# EAGLE board AMS Enerdel Adapter rev9 (EAGLE 9.6.2)
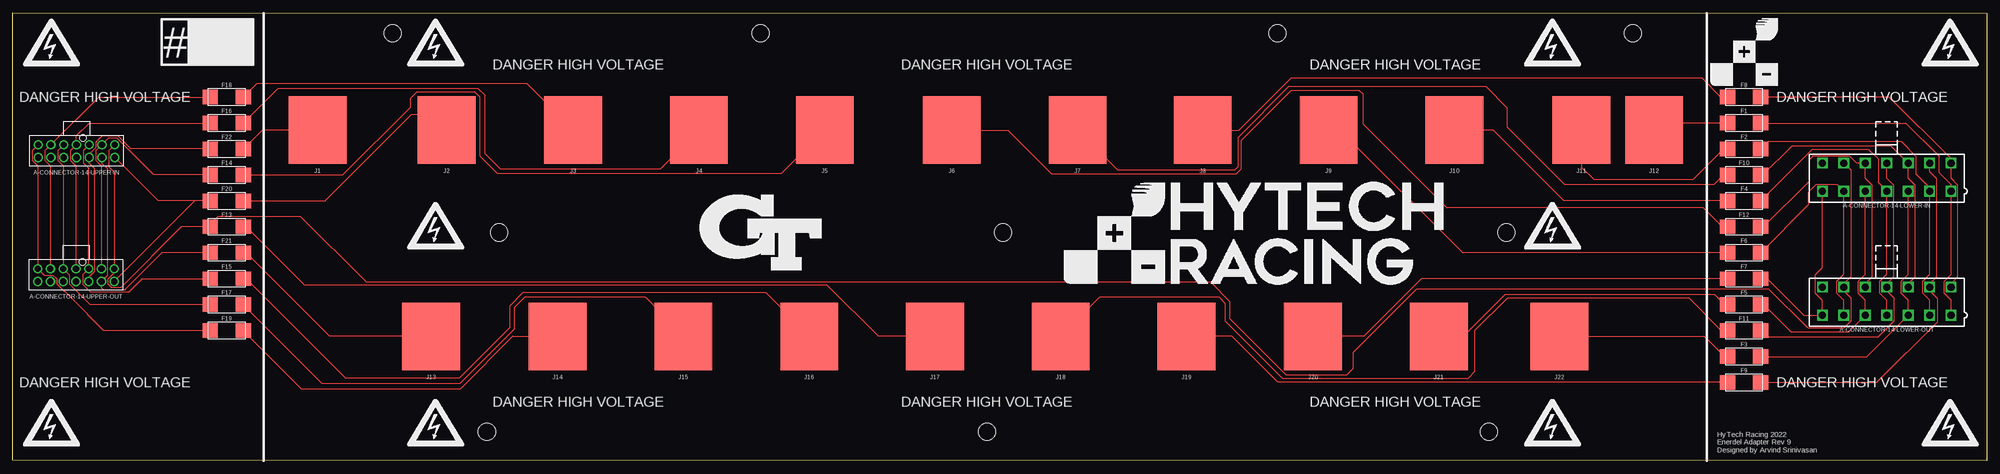
[diagram p0: board, top side]
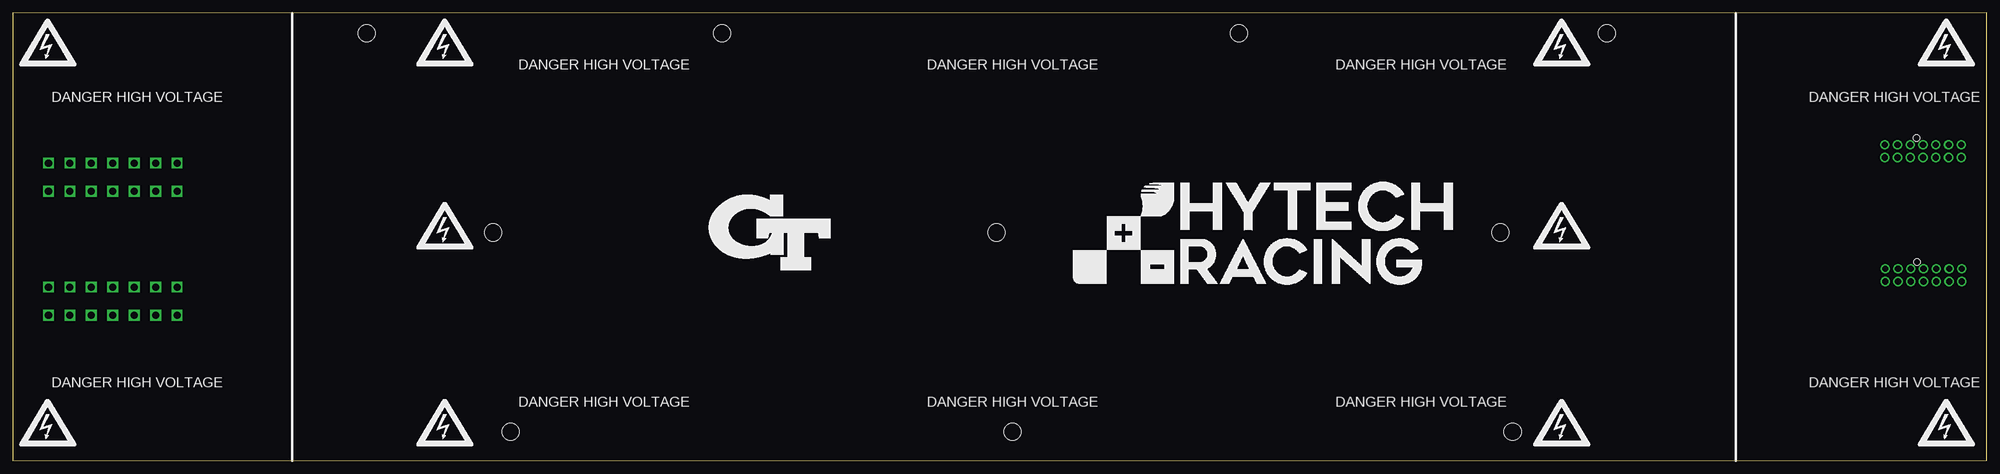
[diagram p1: board, bottom side, seen from below]

Size 386.61 x 87.73 mm. Coordinates in mm from the lower left corner, seen from the top.
Outline: 0,0.1 0,87.73 386.61,87.63 386.61,0 0,0.1
Copper layers (1*16): Top 0.035mm / dielectric 1.53mm / Bottom 0.035mm
Design rules "HyTech Default (2 Layer)": minimum track width 8mil, minimum drill 0.3mm, track to track 8mil, track to pad 8mil, pad to pad 8mil, via to via 22mil, smd to smd 8mil, copper to edge 17mil, drill to drill 23mil, minimum pad ring 9mil, minimum via ring 8mil, stop-mask expansion 8mil, vias tented up to drill 30mil, thermal gap 10mil

## Footprints (pad centres in the part's own frame; a part is rotated, then mirrored left to right if it is on the bottom)
MOLEX_MINIFIT_PTH_14 = drill 1.4 square: 1 12.6,-2.75; 2 8.4,-2.75; 3 4.2,-2.75; 4 0,-2.75; 5 -4.2,-2.75; 6 -8.4,-2.75; 7 -12.6,-2.75; 8 12.6,2.75; 9 8.4,2.75; 10 4.2,2.75; 11 0,2.75; 12 -4.2,2.75; 13 -8.4,2.75; 14 -12.6,2.75
MOLEX_NANOFIT_PTH_14 = drill 1.2: 1 7.5,0; 2 5,0; 3 2.5,0; 4 0,0; 5 -2.5,0; 6 -5,0; 7 -7.5,0; 8 7.5,-2.5; 9 5,-2.5; 10 2.5,-2.5; 11 0,-2.5; 12 -2.5,-2.5; 13 -5,-2.5; 14 -7.5,-2.5 | hole 1.3: 1.27,1.34
OMF_125 = smd 3 x 2.8: 1 -3.25,0; 2 3.25,0
5222 = smd 11.303 x 13.208: 1 0,0
MOUNTING_M3 = hole 3.4: 0,0

## Placement (x,y rotation side)
A-CONNECTOR-14-LOWER-IN  CONNECTOR-14_MINIFIT_  [MOLEX_MINIFIT_PTH_14]  367.03,55.55 0 top
A-CONNECTOR-14-LOWER-OUT  CONNECTOR-14_MINIFIT_  [MOLEX_MINIFIT_PTH_14]  367.03,31.27 0 top
A-CONNECTOR-14-UPPER-IN  CONNECTOR-14_NANOFIT_  [MOLEX_NANOFIT_PTH_14]  12.47,61.9 0 top
A-CONNECTOR-14-UPPER-OUT  CONNECTOR-14_NANOFIT_  [MOLEX_NANOFIT_PTH_14]  12.37,37.62 0 top
F1  FUSE_OMF_125_.63A  [OMF_125]  339.09,66.14 0 top
F2  FUSE_OMF_125_.63A  [OMF_125]  339.09,61.06 0 top
F3  FUSE_OMF_125_.63A  [OMF_125]  339.09,20.42 0 top
F4  FUSE_OMF_125_.63A  [OMF_125]  339.09,50.9 0 top
F5  FUSE_OMF_125_.63A  [OMF_125]  339.09,30.58 0 top
F6  FUSE_OMF_125_.63A  [OMF_125]  339.09,40.74 0 top
F7  FUSE_OMF_125_.63A  [OMF_125]  339.09,35.66 0 top
F8  FUSE_OMF_125_.63A  [OMF_125]  339.09,71.22 0 top
F9  FUSE_OMF_125_.63A  [OMF_125]  339.09,15.34 0 top
F10  FUSE_OMF_125_.63A  [OMF_125]  339.09,55.98 0 top
F11  FUSE_OMF_125_.63A  [OMF_125]  339.09,25.5 0 top
F12  FUSE_OMF_125_.63A  [OMF_125]  339.09,45.82 0 top
F13  FUSE_OMF_125_.63A  [OMF_125]  41.91,45.82 0 top
F14  FUSE_OMF_125_.63A  [OMF_125]  41.91,55.98 0 top
F15  FUSE_OMF_125_.63A  [OMF_125]  41.91,35.66 0 top
F16  FUSE_OMF_125_.63A  [OMF_125]  41.91,66.14 0 top
F17  FUSE_OMF_125_.63A  [OMF_125]  41.91,30.58 0 top
F18  FUSE_OMF_125_.63A  [OMF_125]  41.91,71.22 0 top
F19  FUSE_OMF_125_.63A  [OMF_125]  41.91,25.5 0 top
F20  FUSE_OMF_125_.63A  [OMF_125]  41.91,50.9 0 top
F21  FUSE_OMF_125_.63A  [OMF_125]  41.91,40.74 0 top
F22  FUSE_OMF_125_.63A  [OMF_125]  41.91,61.06 0 top
J1  CONNECTOR-1_5222  [5222]  59.72,64.77 180 top
J2  CONNECTOR-1_5222  [5222]  84.99,64.77 180 top
J3  CONNECTOR-1_5222  [5222]  109.75,64.77 180 top
J4  CONNECTOR-1_5222  [5222]  134.39,64.77 180 top
J5  CONNECTOR-1_5222  [5222]  159.03,64.77 180 top
J6  CONNECTOR-1_5222  [5222]  183.92,64.77 180 top
J7  CONNECTOR-1_5222  [5222]  208.56,64.77 180 top
J8  CONNECTOR-1_5222  [5222]  233.07,64.77 180 top
J9  CONNECTOR-1_5222  [5222]  257.71,64.77 180 top
J10  CONNECTOR-1_5222  [5222]  282.35,64.77 180 top
J11  CONNECTOR-1_5222  [5222]  307.24,64.77 180 top
J12  CONNECTOR-1_5222  [5222]  321.46,64.77 180 top
J13  CONNECTOR-1_5222  [5222]  81.94,24.38 180 top
J14  CONNECTOR-1_5222  [5222]  106.71,24.38 180 top
J15  CONNECTOR-1_5222  [5222]  131.34,24.38 180 top
J16  CONNECTOR-1_5222  [5222]  155.98,24.38 180 top
J17  CONNECTOR-1_5222  [5222]  180.62,24.38 180 top
J18  CONNECTOR-1_5222  [5222]  205.26,24.38 180 top
J19  CONNECTOR-1_5222  [5222]  229.9,24.38 180 top
J20  CONNECTOR-1_5222  [5222]  254.66,24.38 180 top
J21  CONNECTOR-1_5222  [5222]  279.3,24.38 180 top
J22  CONNECTOR-1_5222  [5222]  302.92,24.38 180 top
U$1  [MOUNTING_M3]  74.37,83.69 0 top
U$2  [MOUNTING_M3]  146.46,83.69 0 top
U$3  [MOUNTING_M3]  247.68,83.69 0 top
U$4  [MOUNTING_M3]  317.32,83.69 0 top
U$5  [HV_LARGE]  7.59,81.9 0 top
U$6  [HV_LARGE]  82.83,81.9 0 top
U$7  [DANGER_HIGH_VOLTAGE]  190.78,11.53 0 top
U$8  [DANGER_HIGH_VOLTAGE]  190.78,77.57 0 top
U$9  [DANGER_HIGH_VOLTAGE]  270.79,11.53 0 top
U$10  [DANGER_HIGH_VOLTAGE]  270.79,77.57 0 top
U$11  [DANGER_HIGH_VOLTAGE]  110.77,11.53 0 top
U$12  [HV_LARGE]  301.57,81.9 0 top
U$13  [HV_LARGE]  379.45,81.9 0 top
U$14  [HV_LARGE]  82.83,46.03 0 top
U$15  [DANGER_HIGH_VOLTAGE]  110.77,77.57 0 top
U$16  [LOGO_GT_LARGE]  146.46,44.7 0 top
U$17  [LOGO_HYTECH_SQUARE_EXTRA_LARGE]  339.09,80.11 0 top
U$18  [HV_LARGE]  301.57,46.03 0 top
U$19  [DANGER_HIGH_VOLTAGE]  362.23,15.34 0 top
U$20  [MOUNTING_M3]  95.28,44.7 0 top
U$21  [MOUNTING_M3]  193.95,44.7 0 top
U$22  [MOUNTING_M3]  292.51,44.7 0 top
U$23  [HV_LARGE]  7.59,7.47 0 top
U$24  [HV_LARGE]  82.83,7.47 0 top
U$25  [DANGER_HIGH_VOLTAGE]  362.23,71.22 0 top
U$26  [HV_LARGE]  301.57,7.47 0 top
U$27  [DANGER_HIGH_VOLTAGE]  18.06,15.34 0 top
U$28  [HV_LARGE]  379.45,7.47 0 top
U$29  [MOUNTING_M3]  92.86,5.72 0 top
U$30  [MOUNTING_M3]  190.78,5.72 0 top
U$31  [MOUNTING_M3]  289.08,5.72 0 top
U$32  [LOGO_HYTECH_EXTRA_LARGE]  205.74,34.39 0 top
U$33  [NUMBER]  29.21,77.57 0 top
U$34  [DANGER_HIGH_VOLTAGE]  18.06,71.22 0 top
U$35  [HV_LARGE]  301.98,81.9 0 bottom
U$36  [HV_LARGE]  83.24,81.9 0 bottom
U$37  [HV_LARGE]  301.98,7.47 0 bottom
U$38  [HV_LARGE]  83.24,7.47 0 bottom
U$39  [HV_LARGE]  83.24,46.03 0 bottom
U$40  [HV_LARGE]  301.98,46.03 0 bottom
U$41  [HV_LARGE]  379.76,81.9 0 bottom
U$42  [HV_LARGE]  379.76,7.47 0 bottom
U$43  [HV_LARGE]  7.9,81.9 0 bottom
U$44  [HV_LARGE]  7.9,7.47 0 bottom
U$45  [LOGO_HYTECH_EXTRA_LARGE]  179.07,34.39 0 bottom
U$46  [LOGO_GT_LARGE]  238.35,44.7 0 bottom

## Library data of the parts
A-CONNECTOR-14-LOWER-IN A-CONNECTOR-14-LOWER-OUT = HyTechDevices; MPN: 39-28-1143
A-CONNECTOR-14-UPPER-IN A-CONNECTOR-14-UPPER-OUT = HyTechDevices; MPN: 105310-1114
F1-F22 = HyTechDevices; CURRENT: 630mA; DKPN: 486-2997-ND; FUSE_TYPE: SMD; I2T: 0.02; MANUFACTURER: Schurter Inc.; MOPN: 693-3404.0008.11; MPN: 3404.0008.11; VOLTAGE: 125V
J1-J22 = HyTechDevices; DKPN: 36-5222-ND; MANUFACTURER: Keystone Electronics; MODEL: SPRING; MOPN: 534-5222; MPN: 5222
U$1-U$46 = HyTechManufacturing

## Nets
A1-B7: A-CONNECTOR-14-LOWER-IN.1 A-CONNECTOR-14-LOWER-OUT.1 F1.2
A2-B8: A-CONNECTOR-14-LOWER-IN.2 A-CONNECTOR-14-LOWER-OUT.2 F2.2
A3-B9: A-CONNECTOR-14-LOWER-IN.3 A-CONNECTOR-14-LOWER-OUT.3 F3.2
A4-B10: A-CONNECTOR-14-LOWER-IN.4 A-CONNECTOR-14-LOWER-OUT.4 F4.2
A5-B11: A-CONNECTOR-14-LOWER-IN.5 A-CONNECTOR-14-LOWER-OUT.5 F5.2
A6-B12: A-CONNECTOR-14-LOWER-IN.6 A-CONNECTOR-14-LOWER-OUT.6 F6.2
A7-B13: A-CONNECTOR-14-LOWER-IN.7 A-CONNECTOR-14-LOWER-OUT.7 F7.2
A8-B14: A-CONNECTOR-14-LOWER-IN.8 A-CONNECTOR-14-LOWER-OUT.8 F8.2
A9-B15: A-CONNECTOR-14-LOWER-IN.9 A-CONNECTOR-14-LOWER-OUT.9 F9.2
A10-B16: A-CONNECTOR-14-LOWER-IN.10 A-CONNECTOR-14-LOWER-OUT.10 F10.2
A11-B17: A-CONNECTOR-14-LOWER-IN.11 A-CONNECTOR-14-LOWER-OUT.11 F11.2
A12-B18: A-CONNECTOR-14-LOWER-IN.12 A-CONNECTOR-14-LOWER-OUT.12 F12.2
A13-B19: A-CONNECTOR-14-LOWER-IN.13 A-CONNECTOR-14-LOWER-OUT.13 A-CONNECTOR-14-UPPER-IN.1 A-CONNECTOR-14-UPPER-OUT.1 F13.1
A14-B20: A-CONNECTOR-14-UPPER-IN.2 A-CONNECTOR-14-UPPER-OUT.2 F14.1
A15-B21: A-CONNECTOR-14-UPPER-IN.3 A-CONNECTOR-14-UPPER-OUT.3 F15.1
A16-B22: A-CONNECTOR-14-UPPER-IN.4 A-CONNECTOR-14-UPPER-OUT.4 F16.1
A17-B23: A-CONNECTOR-14-UPPER-IN.5 A-CONNECTOR-14-UPPER-OUT.5 F17.1
A18-B24: A-CONNECTOR-14-UPPER-IN.6 A-CONNECTOR-14-UPPER-OUT.6 F18.1
A19-B25: A-CONNECTOR-14-UPPER-IN.7 A-CONNECTOR-14-UPPER-OUT.7 F19.1
A20-B26: A-CONNECTOR-14-UPPER-IN.8 A-CONNECTOR-14-UPPER-OUT.8 F20.1
A21-B27: A-CONNECTOR-14-UPPER-IN.9 A-CONNECTOR-14-UPPER-OUT.9 F21.1
A22-B28: A-CONNECTOR-14-UPPER-IN.10 A-CONNECTOR-14-UPPER-OUT.10 F22.1
N$1: F1.1 J12.1
N$2: F2.1 J11.1
N$3: F3.1 J22.1
N$4: F4.1 J10.1
N$8: F5.1 J21.1
N$9: F6.1 J9.1
N$10: F7.1 J20.1
N$11: F8.1 J8.1
N$12: F9.1 J19.1
N$13: F10.1 J7.1
N$14: F11.1 J18.1
N$15: F22.2 J1.1
N$16: F21.2 J13.1
N$17: F20.2 J2.1
N$18: F19.2 J14.1
N$19: F18.2 J3.1
N$20: F17.2 J15.1
N$21: F16.2 J4.1
N$22: F15.2 J16.1
N$23: F14.2 J5.1
N$24: F12.1 J6.1
N$25: F13.2 J17.1

## Tracks (layer width: path | path; a pad name or v marks a point on that pad's centre or on a via)
A1-B7
  Top 0.203: A-CONNECTOR-14-LOWER-OUT.1 379.63,31.49 378.27,32.84 378.27,35.19 379.63,36.55 A-CONNECTOR-14-LOWER-IN.1 379.63,54.07 377.29,56.41 377.29,59.59 370.74,66.14 F1.2
A2-B8
  Top 0.203: A-CONNECTOR-14-LOWER-OUT.2 375.43,31.49 374.08,32.84 374.08,35.19 375.43,36.55 A-CONNECTOR-14-LOWER-IN.2 375.43,53.49 372.8,56.11 372.8,59.58 369.94,62.45 343.72,62.45 F2.2
A3-B9
  Top 0.203: A-CONNECTOR-14-LOWER-IN.3 371.23,36.55 369.88,35.19 369.88,32.84 371.23,31.49 A-CONNECTOR-14-LOWER-OUT.3 363.13,20.42 F3.2
A4-B10
  Top 0.203: A-CONNECTOR-14-LOWER-OUT.4 367.03,31.49 365.67,32.84 365.67,35.19 367.03,36.55 A-CONNECTOR-14-LOWER-IN.4 365.33,54.5 365.33,59.11 363.5,60.93 352.33,60.93 342.34,50.95 F4.2
A5-B11
  Top 0.203: A-CONNECTOR-14-LOWER-IN.5 362.83,36.55 361.48,35.19 361.48,32.84 362.83,31.49 A-CONNECTOR-14-LOWER-OUT.5 359.61,25.29 348.27,25.29 342.98,30.58 F5.2
A6-B12
  Top 0.203: A-CONNECTOR-14-LOWER-OUT.6 358.63,31.49 357.27,32.84 357.27,35.19 358.63,36.55 A-CONNECTOR-14-LOWER-IN.6 357.27,54.15 353.25,54.15 351.8,52.71 351.8,50.21 F6.2
A7-B13
  Top 0.203: A-CONNECTOR-14-LOWER-IN.7 354.43,37.82 353.08,36.46 353.08,32.84 354.43,31.49 A-CONNECTOR-14-LOWER-OUT.7 350.75,28.52 343.6,35.66 F7.2
A8-B14
  Top 0.203: A-CONNECTOR-14-LOWER-OUT.8 379.63,34.7 380.99,36.06 380.99,53.98 379.63,55.33 A-CONNECTOR-14-LOWER-IN.8 379.63,59.15 367.56,71.22 F8.2
A9-B15
  Top 0.203: A-CONNECTOR-14-LOWER-IN.9 375.43,56.6 376.78,55.25 376.78,36.06 375.43,34.7 A-CONNECTOR-14-LOWER-OUT.9 375.43,33.33 376.91,31.85 376.91,27.13 365.12,15.34 F9.2
A10-B16
  Top 0.203: A-CONNECTOR-14-LOWER-OUT.10 371.23,34.7 372.59,36.06 372.59,53.98 371.23,55.33 A-CONNECTOR-14-LOWER-IN.10 367.83,61.7 348.49,61.7 342.77,55.98 F10.2
A11-B17
  Top 0.203: A-CONNECTOR-14-LOWER-IN.11 367.03,55.33 368.38,53.98 368.38,36.06 367.03,34.7 A-CONNECTOR-14-LOWER-OUT.11 367.03,33.33 368.38,31.98 368.38,27.34 365.27,24.23 343.61,24.23 F11.2
A12-B18
  Top 0.203: A-CONNECTOR-14-LOWER-OUT.12 362.83,34.7 364.18,36.06 364.18,53.98 362.83,55.33 A-CONNECTOR-14-LOWER-IN.12 361.16,58.3 359.81,59.65 352.54,59.65 351.86,58.97 351.86,54.78 342.9,45.82 F12.2
A13-B19
  Top 0.203: A-CONNECTOR-14-LOWER-IN.13 359.99,56.94 359.99,36.06 358.63,34.7 A-CONNECTOR-14-LOWER-OUT.13 358.63,33.33 359.99,31.98 359.99,27.34 358.57,25.93 351.62,25.93 343.95,33.59 274.88,33.59 262.55,21.26 262.55,18.1 261.29,16.84 249.37,16.84 238.33,27.88 238.33,31.28 234.56,35.05 69.19,35.05 56.41,47.83 40.11,47.83 38.66,46.38 F13.1 33.02,45.82 21.11,33.91 19.37,33.91 18.66,34.62 18.66,35.62 19.87,36.82 A-CONNECTOR-14-UPPER-OUT.1 19.87,56.49 18.77,57.59 18.77,60.69 A-CONNECTOR-14-UPPER-IN.1
A14-B20
  Top 0.203: A-CONNECTOR-14-UPPER-OUT.2 17.37,57.8 16.27,58.9 16.27,60.16 16.27,60.17 16.27,60.7 A-CONNECTOR-14-UPPER-IN.2 18.71,63.14 20.47,63.14 27.63,55.98 F14.1
A15-B21
  Top 0.203: A-CONNECTOR-14-UPPER-IN.3 13.77,60.69 13.77,58.35 14.87,57.25 A-CONNECTOR-14-UPPER-OUT.3 13.66,36.41 13.66,34.62 15.18,33.1 22.84,33.1 25.4,35.66 F15.1
A16-B22
  Top 0.203: A-CONNECTOR-14-UPPER-OUT.4 12.37,57.8 11.27,58.9 11.27,60.69 A-CONNECTOR-14-UPPER-IN.4 12.47,63.64 14.97,66.14 F16.1
A17-B23
  Top 0.203: A-CONNECTOR-14-UPPER-IN.5 8.77,60.69 8.77,58.9 9.87,57.8 A-CONNECTOR-14-UPPER-OUT.5 11.16,36.32 11.16,34.62 15.2,30.58 F17.1
A18-B24
  Top 0.203: A-CONNECTOR-14-UPPER-OUT.6 7.37,57.8 6.27,58.9 6.27,60.69 A-CONNECTOR-14-UPPER-IN.6 16.79,71.22 F18.1
A19-B25
  Top 0.203: A-CONNECTOR-14-UPPER-IN.7 3.77,60.69 3.77,58.9 4.87,57.8 A-CONNECTOR-14-UPPER-OUT.7 6.16,36.32 7.87,36.32 8.57,35.62 8.57,34.71 10.12,33.16 10.2,33.16 11.47,31.89 11.51,31.85 17.86,25.5 F19.1
A20-B26
  Top 0.203: F20.1 35.65,50.9 | A-CONNECTOR-14-UPPER-OUT.8 35.65,50.9 | 35.65,50.9 28.47,50.9 A-CONNECTOR-14-UPPER-IN.8
A21-B27
  Top 0.203: A-CONNECTOR-14-UPPER-IN.9 17.47,58.31 18.57,57.21 18.57,36.32 A-CONNECTOR-14-UPPER-OUT.9 17.37,33.85 17.71,33.51 21.98,33.51 22,33.53 22.23,33.76 29.21,40.74 F21.1
A22-B28
  Top 0.203: A-CONNECTOR-14-UPPER-OUT.10 14.87,35.91 16.07,37.12 16.07,57.21 14.97,58.31 A-CONNECTOR-14-UPPER-IN.10 14.97,60.01 16.27,61.31 16.27,62.44 16.3,62.44 17.42,63.55 20.64,63.55 23.13,61.06 F22.1
N$1
  Top 0.203: J12.1 322.58,64.77 323.95,66.14 F1.1
N$2
  Top 0.203: J11.1 307.24,57.53 309.73,55.04 329.06,55.04 335.08,61.06 F2.1
N$3
  Top 0.203: F3.1 335.28,20.42 331.47,24.23 331.32,24.38 J22.1
N$4
  Top 0.203: J10.1 289.97,64.77 303.84,50.9 F4.1
N$8
  Top 0.203: J21.1 284.15,24.38 292.27,32.5 333.35,32.5 335.27,30.58 F5.1
N$9
  Top 0.203: F6.1 283.97,40.74 259.94,64.77 J9.1
N$10
  Top 0.203: F7.1 275.91,35.66 264.63,24.38 J20.1
N$11
  Top 0.203: J8.1 240.16,64.77 250.3,74.92 330.87,74.92 334.57,71.22 F8.1
N$12
  Top 0.203: J19.1 238.78,24.38 247.83,15.34 F9.1
N$13
  Top 0.203: J7.1 216.43,56.9 239.29,56.9 239.95,57.56 239.95,63.27 249.99,73.3 288.48,73.3 292.62,69.16 292.62,65.43 303.92,54.13 333.26,54.13 335.12,55.98 F10.1
N$14
  Top 0.203: J18.1 212.88,32 236.3,32 237.51,30.78 237.51,27.3 248.74,16.08 284.96,16.08 286.31,17.42 286.31,25.48 292.68,31.85 328.32,31.85 334.67,25.5 F11.1
N$15
  Top 0.203: F22.2 46.71,62.61 47.7,63.6 48.87,64.77 J1.1
N$16
  Top 0.203: J13.1 62.08,24.38 49.53,36.93 45.72,40.74 F21.2
N$17
  Top 0.203: J2.1 82.02,67.74 78.03,67.74 61.07,50.79 60.96,50.9 F20.2
N$18
  Top 0.203: J14.1 97.94,24.38 87.59,14.03 56.63,14.03 F19.2
N$19
  Top 0.203: J3.1 100.6,73.92 47.86,73.92 F18.2
N$20
  Top 0.203: J15.1 131.34,24.64 123.85,32.13 100.33,32.13 98.25,30.05 98.25,25.82 87.53,15.11 60.64,15.11 F17.2
N$21
  Top 0.203: J4.1 126.75,57.12 95.5,57.12 92.53,60.1 92.53,71.55 91.08,73 52.02,73 F16.2
N$22
  Top 0.203: J16.1 147.4,32.97 100,32.97 97.41,30.38 97.41,26.16 87.45,16.21 65.18,16.21 45.72,35.66 F15.2
N$23
  Top 0.203: J5.1 150.5,56.24 94.92,56.24 91.57,59.59 91.57,71.2 90.47,72.29 79.24,72.29 77.91,70.97 77.91,69.24 64.65,55.98 F14.2
N$24
  Top 0.203: J6.1 194.88,64.77 203.44,56.21 239.64,56.21 240.66,57.24 240.66,62.76 250.44,72.54 263.68,72.54 264.39,71.83 264.39,66.05 280.91,49.53 331.14,49.53 334.84,45.82 F12.1
N$25
  Top 0.203: J17.1 169.53,24.38 159.52,34.39 57.15,34.39 49.53,42.01 45.72,45.82 F13.2

## Text on the board
tPlace: HyTech Racing 2022 / Enerdel Adapter Rev 9 / Designed by Arvind Srinivasan
tNames: J6